# EAGLE board 2018-10-31_17-33-27 (EAGLE 6.4)
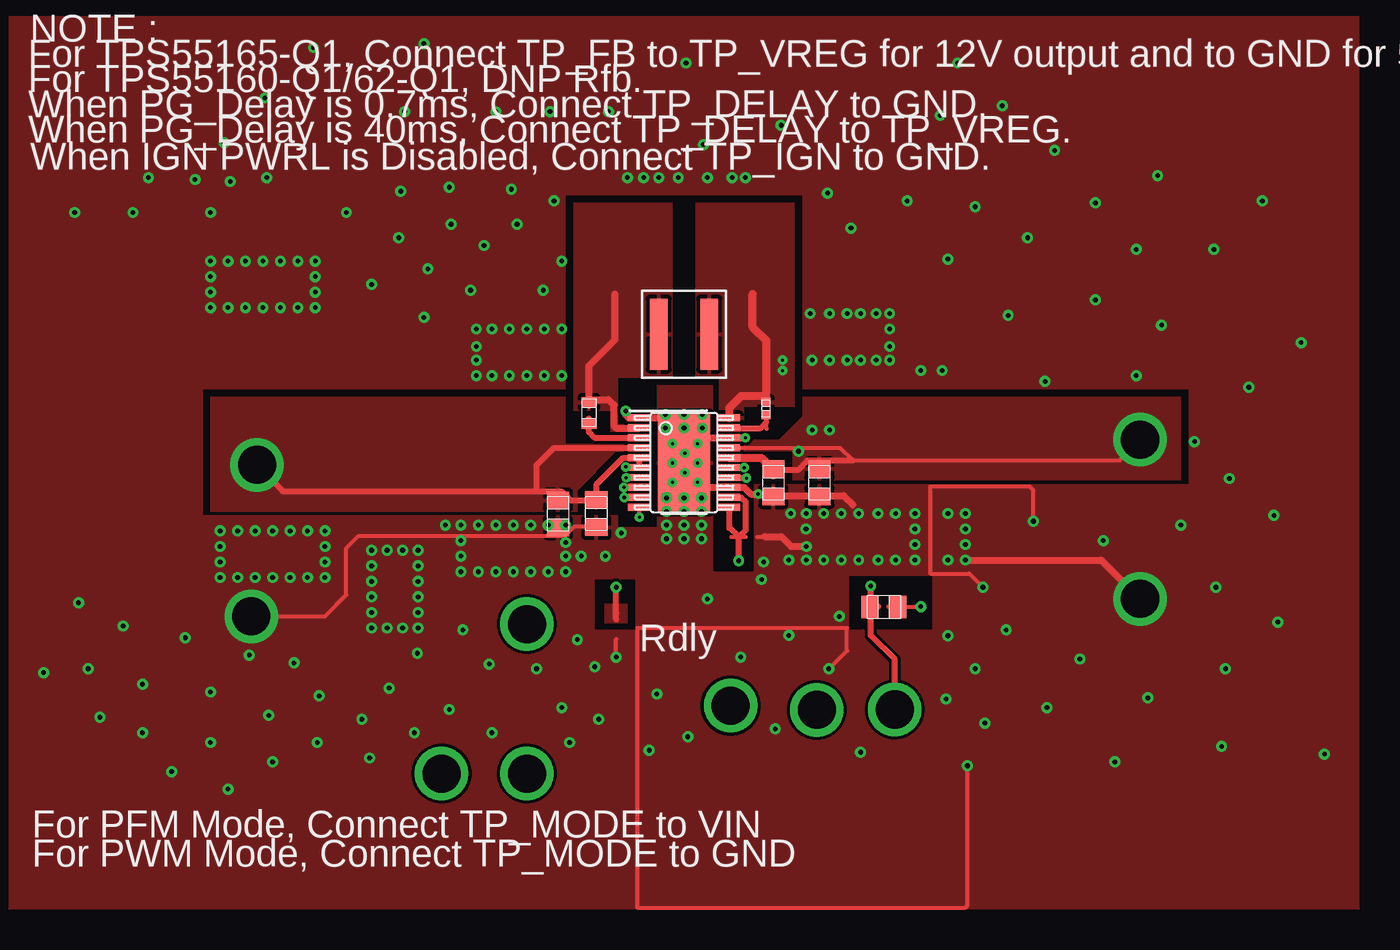
[diagram p0: board, top side]
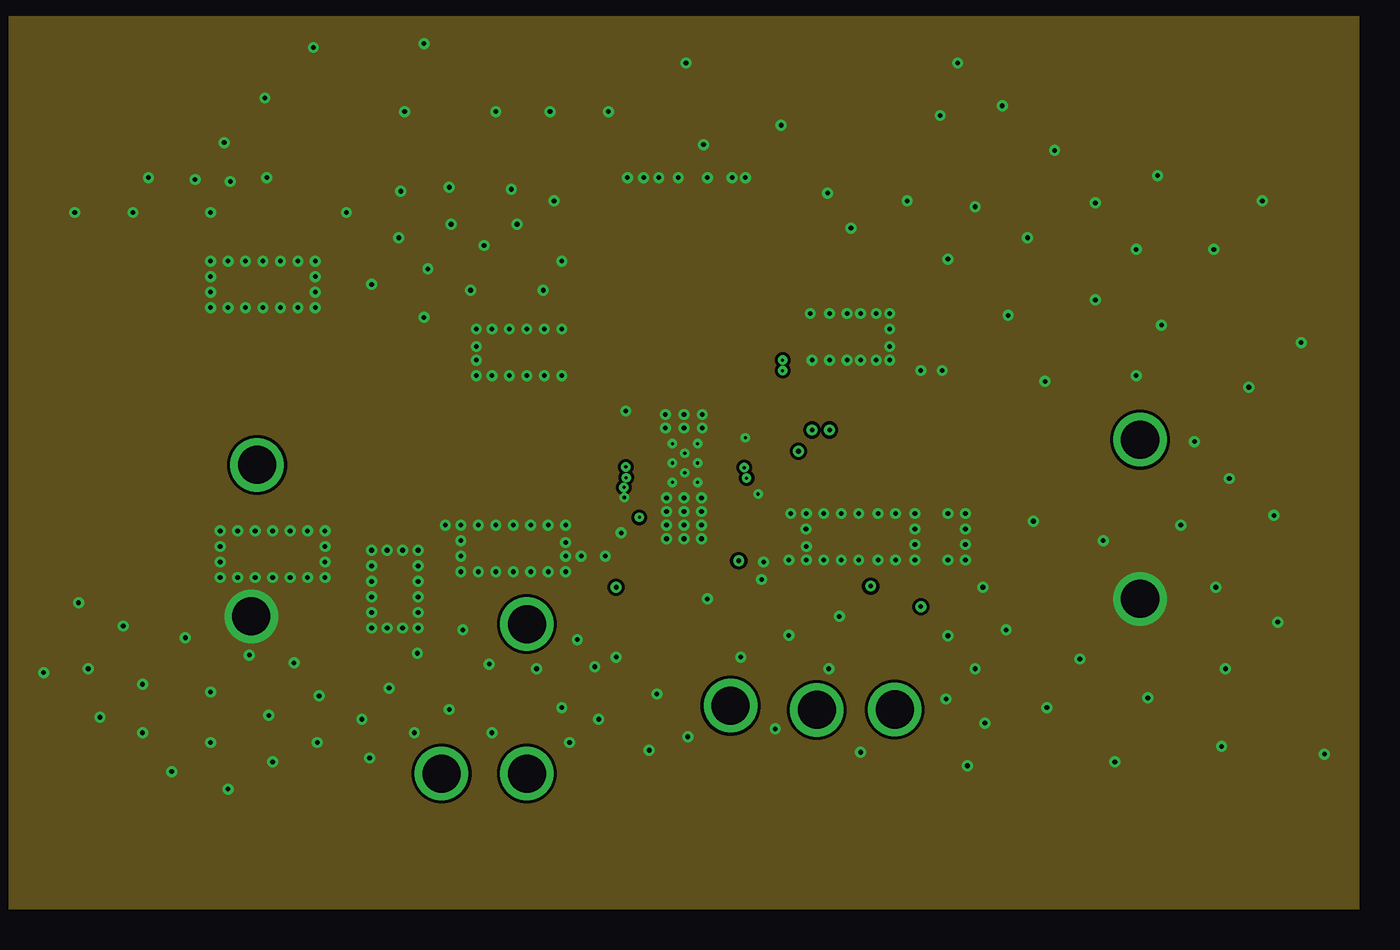
[diagram p1: board, inner layer INTERNAL1]
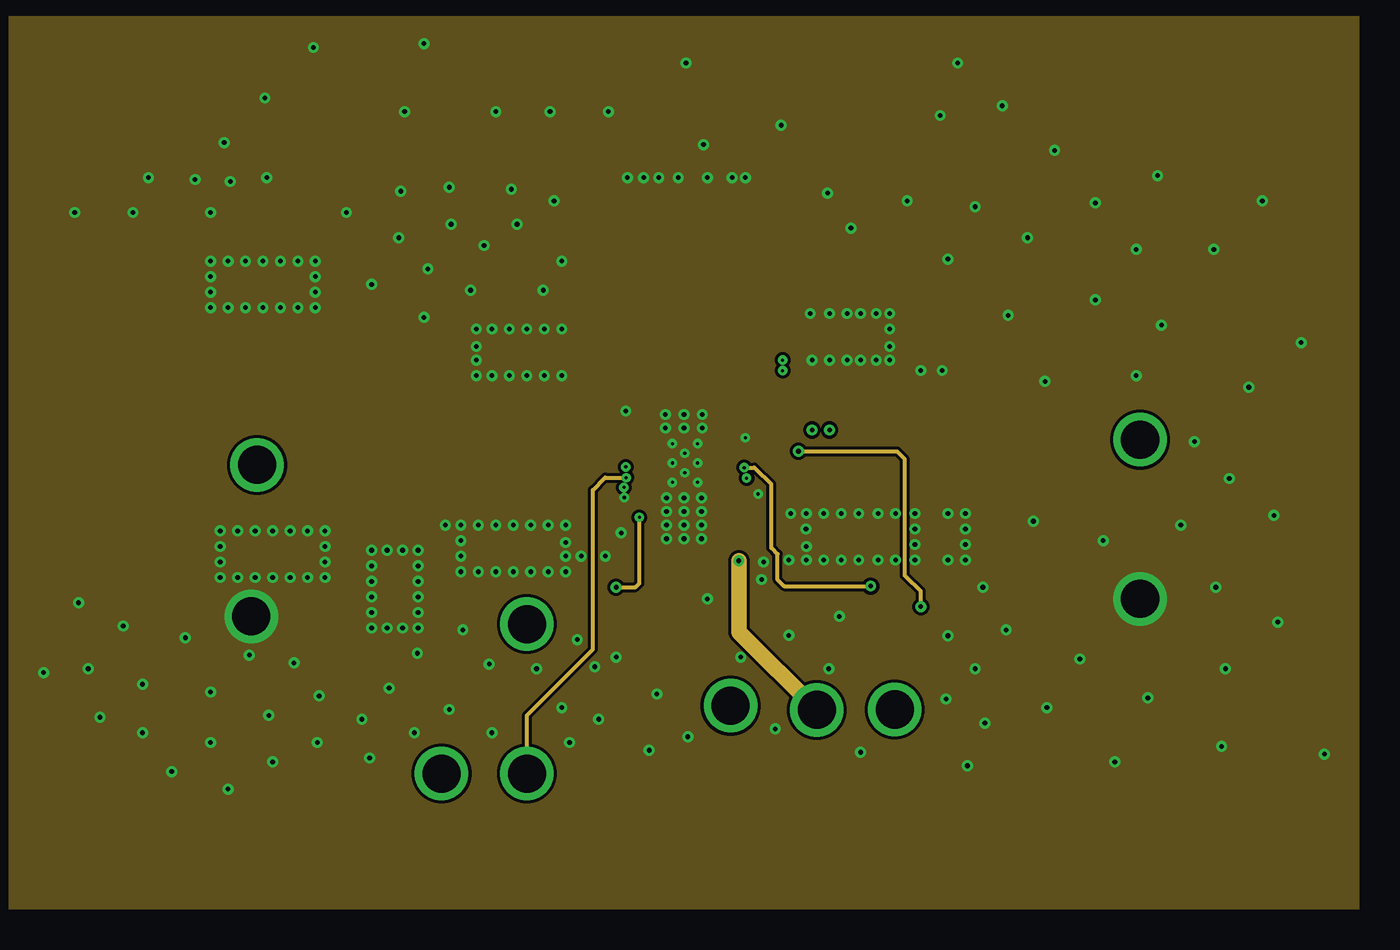
[diagram p2: board, inner layer INTERNAL2]
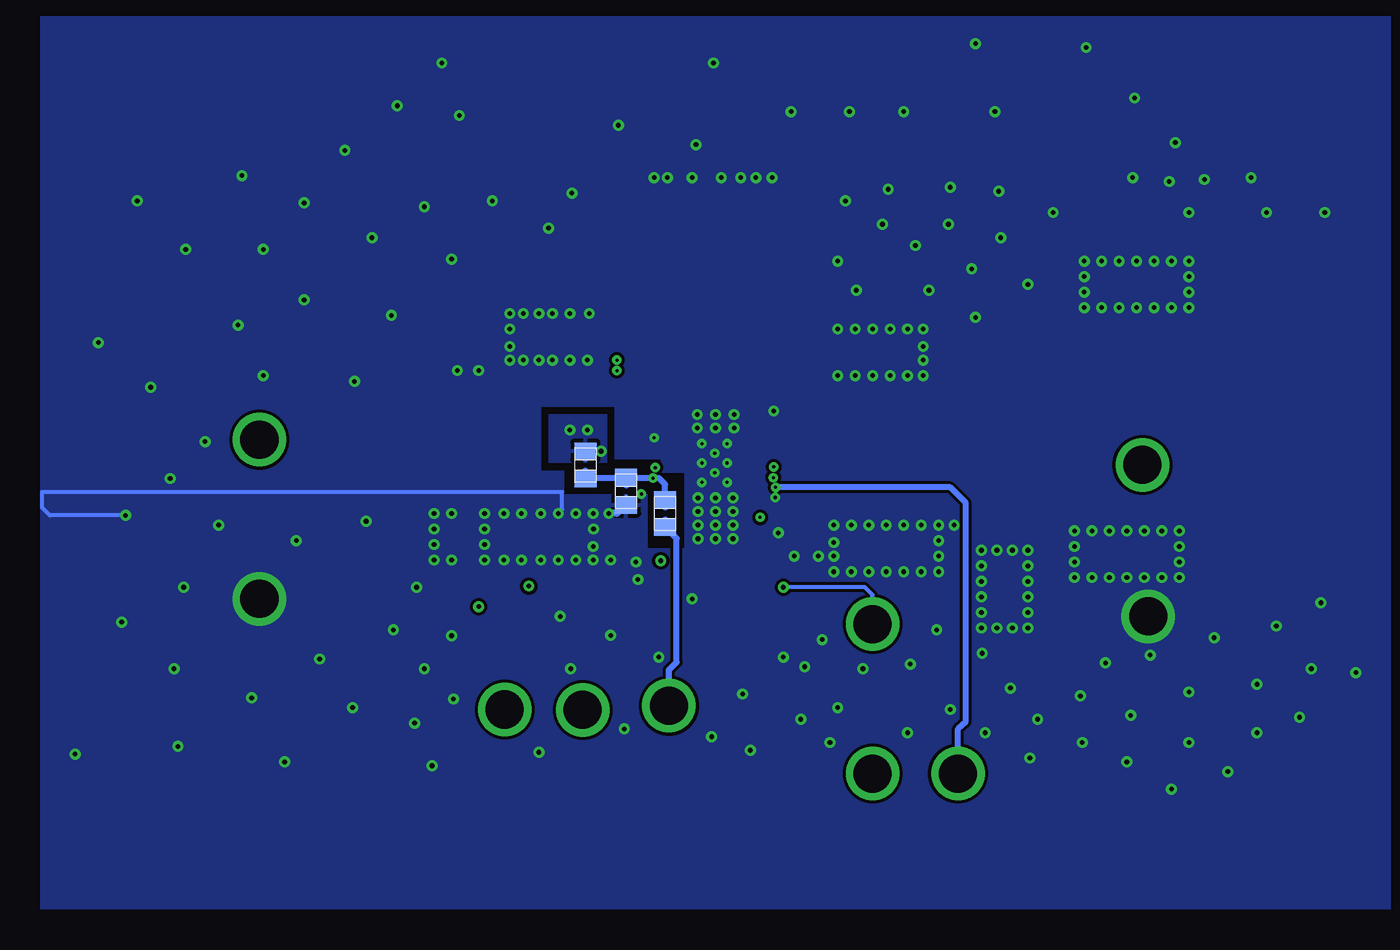
[diagram p3: board, bottom side, seen from below]

No outline drawn. Coordinates in mm, seen from the top.
Copper layers ((1*2)+(15*16)): TOP / INTERNAL1 / layer 15 / BOTTOM

## Footprints (pad centres in the part's own frame; a part is rotated, then mirrored left to right if it is on the bottom)
0603 = smd 0.66 x 0.965: 1 -0.699,0; 2 0.699,0
0402 = smd 0.559 x 0.61: 1 -0.419,0; 2 0.419,0
0805 = smd 1.118 x 1.448: 1 -0.902,0; 2 0.902,0
TP-1502 = drill 0.813 round: 1 0,0
XAL5030 = smd 1.168 x 4.648: 1 -1.651,0; 2 1.651,0
PWP0020P_N = smd 1.4 x 0.45: 1 -2.95,2.925; 2 -2.95,2.275; 3 -2.95,1.625; 4 -2.95,0.975; 5 -2.95,0.325; 6 -2.95,-0.325; 7 -2.95,-0.975; 8 -2.95,-1.625; 9 -2.95,-2.275; 10 -2.95,-2.925; 11 2.95,-2.925; 12 2.95,-2.275; 13 2.95,-1.625; 14 2.95,-0.975; 15 2.95,-0.325; 16 2.95,0.325; 17 2.95,0.975; 18 2.95,1.625; 19 2.95,2.275; 20 2.95,2.925 | smd 3.4 x 6.5: 21 0,0

## Placement (x,y rotation side)
Cbst1  [0603]  64.14,58.65 270 top
Cbst2  [0402]  75.72,58.93 270 top
Cin  [0805]  62.1,52.04 270 top
Cinx  [0805]  64.62,52.07 270 top
Co_sense  [0805]  76.2,54.08 270 top
Cout  [0805]  79.22,54.08 270 top
Cvreg  [0402_065]  74.78,50.55 0 top
GND  [TP-1502]  42.04,45.34 0 top
GND1  [TP-1502]  100.18,46.46 0 top
L1  [XAL5030]  70.36,63.8 180 top
Rfb  [0805]  73.66,52.07 90 bottom
Rfbb  [0805]  76.2,53.52 270 bottom
Rfbt  [0805]  78.87,55.24 270 bottom
Rpg  [0805]  83.44,45.95 180 top
TP_Delay  [TP-1502]  60.05,44.81 0 top
TP_FB  [TP-1502]  73.41,39.5 0 top
TP_IGN  [TP-1502]  54.46,35.03 0 top
TP_MODE  [TP-1502]  60.05,35.03 0 top
TP_PG  [TP-1502]  84.12,39.22 0 top
TP_VREG  [TP-1502]  79.02,39.22 0 top
U1  [PWP0020P_N]  70.36,55.4 0 top
VIN  [TP-1502]  42.42,55.24 0 top
VOUT  [TP-1502]  100.18,56.9 0 top

## Library data of the parts
Cbst1 = ultra-librarian; RefDes: Cbst1; Type: C0603C104Z3VACTU
Cbst2 = ultra-librarian; RefDes: Cbst2; Type: GRM155R71A104KA01D
Cin = ultra-librarian; RefDes: Cin; Type: C2012X5R1V226M125AC
Cinx = ultra-librarian; RefDes: Cinx; Type: GMK212BJ474KG-T
Co_sense = ultra-librarian; RefDes: Co_sense; Type: C2012X7R1H104K085AA
Cout = ultra-librarian; RefDes: Cout; Type: C2012X5R1V226M125AC
Cvreg = ultra-librarian; RefDes: Cvreg; Type: GRM155R61A475MEAAD
GND = ultra-librarian; RefDes: GND; Type: TP-1502
GND1 = ultra-librarian; RefDes: GND1; Type: TP-1502
L1 = ultra-librarian; RefDes: L1; Type: XAL5030-472MEB
Rfb = ultra-librarian; RefDes: Rfb; Type: CRCW06039K09FKEA
Rfbb = ultra-librarian; RefDes: Rfbb; Type: CRCW06039K09FKEA
Rfbt = ultra-librarian; RefDes: Rfbt; Type: CRCW060382K5FKEA
Rpg = ultra-librarian; RefDes: Rpg; Type: ERJ-6ENF1003V
TP_Delay = ultra-librarian; RefDes: TP_Delay; Type: TP-1502
TP_FB = ultra-librarian; RefDes: TP_FB; Type: TP-1502
TP_IGN = ultra-librarian; RefDes: TP_IGN; Type: TP-1502
TP_MODE = ultra-librarian; RefDes: TP_MODE; Type: TP-1502
TP_PG = ultra-librarian; RefDes: TP_PG; Type: TP-1502
TP_VREG = ultra-librarian; RefDes: TP_VREG; Type: TP-1502
U1 = ultra-librarian; RefDes: U1; Type: TPS55165QPWPRQ1
VIN = ultra-librarian; RefDes: VIN; Type: TP-1502
VOUT = ultra-librarian; RefDes: VOUT; Type: TP-1502

## Nets
0: Cin.2 Cinx.2 Co_sense.2 Cout.2 Cvreg.2 GND1.1 GND.1 Rfbb.2 U1.1 U1.9 U1.13 U1.18 U1.21
5: Cin.1 Cinx.1 U1.4 U1.5 U1.6 VIN.1
6: Cbst2.1 L1.1 U1.20
7: Cbst1.1 L1.2 U1.2
8: Co_sense.1 Cout.1 Rfbt.1 Rpg.1 U1.16 U1.17 VOUT.1
9: Cbst1.2 U1.3
13: TP_Delay.1 U1.10
14: Rpg.2 TP_PG.1 U1.15
15: Rfb.2 Rfbb.1 Rfbt.2 U1.14
17: Cvreg.1 TP_VREG.1 U1.11 U1.12
18: TP_MODE.1 U1.7
20: Cbst2.2 U1.19
21: TP_IGN.1 U1.8
22: Rfb.1 TP_FB.1

## Tracks (layer width: path | path; a pad name or v marks a point on that pad's centre or on a via)
0  (via drill 0.2 pad 0.48, 0.3 pad 0.58, 2.49 pad 3.48)
  TOP 0.254: GND.1 46.86,45.34 48.26,46.74 48.26,49.78 49.07,50.6 60.71,50.6 62.59,50.6 63.2,51.23 64.64,51.23 | v65.91,42.67 65.91,43.84 | v93.22,51.56 93.22,53.59 92.96,53.85 86.49,53.85 86.49,48.13 89.03,48.13 v89.92,47.24 | v88.9,35.56 88.9,26.42 88.77,26.29 67.31,26.29 67.31,44.58 81.03,44.58 81.03,43.08 v79.83,41.91 | 76.19,52.76 76.19,53.7 | 75.16,50.53 76.1,50.53 | 64.63,50.75 64.63,51.69
  TOP 0.381: v66.45,53.11 67.44,53.11
  TOP 0.45: 81.41,52.63 80.8,53.24 76.2,53.24 76.1,53.34 v75.21,53.34 74.73,53.34 74.3,53.77 73.33,53.77 71.04,53.77 70.38,54.43 70.38,55.4 70.38,55.78 v71.25,56.64 71.63,57.02 73.33,57.02 74.24,57.02 | v100.2,46.48 97.66,49.02 v88.77,49.02 | v69.14,58.55 68.94,58.32 67.44,58.32 66.73,58.32 66.55,58.52 v66.55,58.78 | v78.36,49.91 77.37,49.91 76.73,50.55 75.64,50.55
  BOTTOM 0.254: v108.97,51.94 113.92,51.94 114.43,52.45 114.43,53.47 80.39,53.47 80.39,52.32 v80.64,52.07 | 76.19,52.22 76.19,53.16
  BOTTOM 0.45: 76.2,52.68 76.81,52.07 v77.34,52.07
  other vias: 54.74,51.31 85.47,52.07 85.47,49.02 84.2,49.02 83.06,49.02 84.2,52.07 85.47,50.04 74.07,42.67 70.41,56.01 74.37,57.02 40.01,50.93 62.36,68.58 83.82,62.1 99.95,61.09 89.41,41.91 91.57,65.02 61.59,78.36 58.04,78.36 53.34,82.8 51.82,73.15 92.84,70.1 94.61,75.82 91.19,78.74 42.93,79.25 46.1,82.55 52.07,78.36 66.65,74.04 69.98,74.04 87.63,68.71 81.28,70.74 76.71,77.47 87.12,78.11 88.27,81.53 65.41,78.36 70.48,81.53 71.63,76.2 74.37,74.04 59.05,73.28 59.44,70.99 56.39,66.67 55.12,70.99 43.94,68.58 106.05,54.36 79.76,73.03 73.51,74.04 71.88,74.04 68.71,74.04 67.72,74.04 61.85,72.52 54.99,73.41 69.6,54.1 71.25,54.1 71.25,55.37 69.6,55.37 69.6,56.64 70.41,54.74 40.67,73.79 84.96,72.52 101.35,74.17 57.28,69.6 49.91,67.06 53.34,64.9 40.51,68.58 45.09,68.58 40.26,76.33 48.26,71.75 89.41,72.14 101.6,64.39 64.52,42.04 68.58,40.26 64.77,38.61 70.61,37.47 81.92,36.45 77.22,44.09 87.63,44.07 97.79,50.29 105.79,41.91 112.27,36.32 87.5,39.93 94.11,39.37 105.16,47.24 98.55,35.81 102.87,51.31 105.54,36.83 100.71,40.01 68.07,36.58 43.43,35.81 34.92,37.72 51.05,40.64 36.83,35.18 41.91,42.8 46.35,37.08 39.37,40.39 37.72,43.94 30.73,46.23 39.37,37.08 46.48,40.13 49.78,36.07 52.7,37.72 57.78,37.72 62.87,37.08 43.18,38.86 62.36,39.37 54.99,39.24 52.91,42.93 60.71,41.91 63.37,43.81 55.88,44.45 57.61,42.21 109.22,44.96 97.28,66.04 93.98,60.71 99.95,69.34 97.28,72.39 105.03,69.34 107.31,60.33 110.74,63.25 108.2,72.52 91.44,44.45 90.04,38.35 96.27,42.55 103.76,56.77 49.28,38.61 40.51,34.04 44.83,42.29 34.92,40.89 31.37,41.91 33.66,44.7 32.13,38.73 28.45,41.66 53.59,68.07 51.69,70.1 42.8,68.58 30.48,71.75 39.37,71.75 35.31,74.04 34.29,71.75 38.35,73.91 43.05,74.04 41.66,68.58 80.52,45.34 71.5,50.42 69.22,50.42 70.36,50.42 71.5,51.31 69.22,51.31 70.36,51.31 71.5,53.09 71.55,58.55 70.36,58.55 69.14,57.66 70.36,57.66 71.55,57.66 69.22,53.09 69.22,52.2 70.36,53.09 71.5,52.2 70.36,52.2 65.2,49.28 42.29,47.88 43.43,47.88 45.72,47.88 41.15,47.88 44.58,47.88 39.37,66.55 39.37,67.56 39.37,68.58 46.23,68.58 46.23,67.56 46.23,66.55 40.01,47.88 40.01,48.9 40.01,49.91 52.96,49.66 57.78,64.14 56.77,62.99 56.77,62.1 60.07,64.14 61.21,64.14 56.77,64.14 58.93,64.14 62.36,64.14 62.61,48.26 62.61,49.28 60.33,48.26 59.18,48.26 56.9,48.26 61.47,48.26 58.04,48.26 88.77,50.04 88.77,51.05 87.63,49.02 78.36,49.02 81.79,49.02 77.22,49.02 79.5,49.02 80.64,49.02 78.61,65.15 81.92,65.15 82.93,62.1 79.88,65.15 81.03,65.15 83.82,64.14 82.93,65.15 61.14,66.67 83.82,65.15 87.25,61.42 85.85,61.42 76.33,37.97 87.63,52.07 83.06,52.07 78.36,52.07 81.79,52.07 79.5,52.07 88.77,52.07 62.61,51.31 60.33,51.31 59.18,51.31 56.9,51.31 61.47,51.31 58.04,51.31 55.75,51.31 55.75,50.29 55.75,49.28 55.75,48.26 44.58,50.93 41.15,50.93 45.72,50.93 43.43,50.93 42.29,50.93 46.86,47.88 46.86,48.9 46.86,49.91 46.86,50.93 46.23,65.53 39.37,65.53 43.94,65.53 40.51,65.53 45.09,65.53 42.8,65.53 41.66,65.53 57.78,61.09 62.36,61.09 58.93,61.09 56.77,61.09 61.21,61.09 60.07,61.09 81.03,62.1 79.88,62.1 81.92,62.1 83.82,62.99 78.74,62.1 49.91,47.62 52.96,44.58 51.94,44.58 52.96,45.59 52.96,46.61 50.93,44.58 52.96,47.62 49.91,44.58 49.91,45.59 51.94,49.66 52.96,48.64 49.91,46.61 50.93,49.66 49.91,49.66 49.91,48.64 71.88,46.48 75.44,47.75 63.63,49.28 75.56,48.9 85.47,51.05 78.33,51.05 66.24,50.8 62.61,50.16 42.04,45.34
  pour TOP (rank 4): 65.15,43.18 65.15,44.48 66.65,44.48 66.65,43.18
  pour TOP (rank 6): 86.61,44.45 67.44,44.45 67.44,26.16 114.55,26.16 114.55,84.58 26.16,84.58 26.16,26.16 67.31,26.16 67.31,44.45 64.52,44.45 64.52,47.75 67.18,47.75 67.18,44.58 81.15,44.58 81.15,48.01 86.49,48.01 86.49,53.98 74.93,53.98 74.93,48.26 72.26,48.26 72.26,60.45 68.58,60.45 68.58,51.18 66.04,51.18 66.04,51.94 38.86,51.94 38.86,60.2 62.61,60.2 62.61,72.9 78.11,72.9 78.11,60.2 103.38,60.2 103.38,53.98 86.61,53.98
  pour BOTTOM (rank 5): 73.91,54.74 72.39,54.74 72.39,49.78 74.8,49.78 74.8,53.34 114.55,53.34 114.55,26.16 26.16,26.16 26.16,84.58 114.55,84.58 114.55,53.47 80.26,53.47 80.26,54.86 81.79,54.86 81.79,59.05 76.96,59.05 76.96,55.63 73.91,55.63
  pour INTERNAL2 (rank 4): 26.16,84.58 114.55,84.58 114.55,26.16 26.16,26.16
  pour INTERNAL1 (rank 5): 26.16,84.58 114.55,84.58 114.55,26.16 26.16,26.16
5  (via drill 0.2 pad 0.48, 2.49 pad 3.48)
  TOP 0.254: 64.63,52.45 64.63,53.39
  TOP 0.381: 60.71,53.52 60.71,55.22 61.85,56.36 67.44,56.36 | VIN.1 44.12,53.52 60.71,53.52 | v66.55,55.12 66.57,55.07 67.44,55.07 67.44,55.7 66.37,55.7 64.64,53.98 64.64,52.93 62.92,52.93 62.33,53.52 60.71,53.52
  other vias: 42.42,55.24
  pour TOP (rank 2): 63.37,53.59 65.91,56.13 68.2,56.13 68.2,56.64 62.61,56.64 62.61,59.69 39.37,59.69 39.37,52.2 63.37,52.2
6  (via drill 0.2 pad 0.58)
  TOP 0.254: 75.75,59.28 75.75,60.22
  TOP 0.508: 73.33,58.32 73.33,58.98 74.12,59.77 75.74,59.77 75.74,63.37 74.85,64.26 74.85,66.42
  other vias: 76.81,62.1 76.81,61.42
  pour TOP (rank 3): 71.12,72.39 77.6,72.39 77.6,59.05 74.3,59.05 74.3,58.04 72.64,58.04 72.64,60.96 71.12,60.96
7
  TOP 0.254: 64.12,59.03 64.12,59.97
  TOP 0.45: 67.44,57.66 65.91,57.66 65.79,57.78 65.79,59.16 65.41,59.51 64.14,59.51 64.14,61.72 65.84,63.42 65.84,66.42
  pour TOP (rank 2): 68.2,57.4 65.53,57.4 65.53,58.8 63.12,58.8 63.12,72.39 69.6,72.39 69.6,60.96 66.04,60.96 66.04,57.91 68.2,57.91
8  (via drill 0.3 pad 0.58, 2.49 pad 3.48)
  TOP 0.254: 73.33,56.36 80.57,56.36 81.41,55.55 98.86,55.55 v100.2,56.9 | v85.85,45.97 84.28,45.97 83.72,45.97 | 83.8,45.96 84.73,45.96 | 76.19,54.46 76.19,55.4
  TOP 0.381: 76.2,54.48 76.2,54.94 77.85,54.94 78.44,55.55 81.41,55.55
  TOP 0.508: 76.2,54.94 75.41,55.7 73.33,55.7
  INTERNAL2 0.254: v77.85,56.13 84.3,56.13 84.81,55.6 84.81,48.01 85.85,46.99 v85.85,45.97
  BOTTOM 0.254: 78.85,55.6 78.85,56.54
  other vias: 78.74,57.53 79.88,57.53
  pour TOP (rank 3): 74.93,56.9 76.58,56.9 78.11,58.42 78.11,59.69 102.87,59.69 102.87,54.23 77.47,54.23 77.47,56.13 72.64,56.13 72.64,56.64
  pour BOTTOM: 77.47,55.37 77.47,58.55 81.28,58.55 81.28,55.37
9
  TOP 0.254: 64.12,57.33 64.12,58.27
  TOP 0.381: 67.44,57.02 64.49,57.02 64.14,57.4 64.14,57.81 64.14,58.27
13  (via drill 0.2 pad 0.48, 0.3 pad 0.58, 2.49 pad 3.48)
  TOP 0.254: v67.44,51.82 67.44,52.45
  TOP 0.381: 65.91,45.14 65.91,45.54 v65.91,47.24
  INTERNAL2 0.254: v67.44,51.82 67.44,47.5 67.18,47.24 v65.91,47.24
  BOTTOM 0.254: v60.07,44.83 60.07,46.74 60.58,47.24 v65.91,47.24
  pour TOP: 65.15,44.88 65.15,46.18 66.65,46.18 66.65,44.88
14  (via drill 0.2 pad 0.48, 0.3 pad 0.58, 2.49 pad 3.48)
  TOP 0.254: 82.09,45.96 83.03,45.96
  TOP 0.381: 73.33,55.07 v74.3,55.07 | 82.58,45.97 v82.58,47.32 | 82.58,45.97 83.06,45.97 | 82.58,45.97 82.58,44.07 84.15,42.52 v84.15,39.24
  INTERNAL2 0.254: v74.3,55.07 74.95,55.07 76.07,53.98 76.07,49.81 76.48,49.4 76.48,47.73 76.91,47.32 v82.58,47.32
15  (via drill 0.2 pad 0.48)
  TOP 0.381: 73.33,54.41 74.42,54.41 v74.45,54.38
  BOTTOM 0.254: 76.19,53.9 76.19,54.84 | 78.85,53.9 78.85,54.84 | 73.65,52.43 73.65,53.37
  BOTTOM 0.381: 76.2,54.38 v74.45,54.38 74.07,54.38 73.66,53.98 73.66,52.91 73.66,52.45 | 78.87,54.38 78.87,54.89 | 76.2,54.38 78.84,54.38 | 76.2,54.38 | 76.2,53.9 76.2,54.38
17  (via drill 0.3 pad 0.58, 2.49 pad 3.48)
  TOP 0.254: 73.46,50.53 74.4,50.53
  TOP 0.381: 73.94,50.55 73.33,51.13 73.33,52.45 | 73.33,53.11 74.09,53.11 74.4,52.81 74.4,50.98 73.94,50.55 | v73.94,48.97 73.94,50.55
  INTERNAL2 1.016: v79.05,39.22 73.94,44.3 v73.94,48.97
18  (via drill 0.2 pad 0.48, 2.49 pad 3.48)
  TOP 0.254: v66.57,54.41 67.44,54.41
  INTERNAL2 0.254: v66.57,54.41 65.2,54.41 64.39,53.59 64.39,43.18 60.07,38.86 v60.07,35.05
20
  TOP 0.254: 75.75,57.58 75.75,58.52
  TOP 0.381: 73.33,57.66 75.36,57.66 75.74,58.06
21  (via drill 0.2 pad 0.48, 2.49 pad 3.48)
  TOP 0.381: v66.42,53.77 67.44,53.77
  BOTTOM 0.381: v66.42,53.77 54.99,53.77 53.98,52.76 53.98,38.46 54.48,37.97 v54.48,35.05
22  (via drill 2.49 pad 3.48)
  BOTTOM 0.254: 73.65,50.72 73.65,51.66
  BOTTOM 0.381: 73.66,51.69 73.66,51.21 72.9,50.44 72.9,42.34 73.41,41.83 TP_FB.1
  other vias: 73.41,39.5

## Text on the board
ASSYNOTES: NOTE : | For TPS55165-Q1, Connect TP_FB to TP_VREG for 12V output and to GND for 5V output. DNP Rfbb and Rfbt. | For TPS55160-Q1/62-Q1, DNP Rfb. | When PG_Delay is 0.7ms, Connect TP_DELAY to GND. | When PG_Delay is 40ms, Connect TP_DELAY to TP_VREG. | When IGN PWRL is Disabled, Connect TP_IGN to GND. | Rdly | For PFM Mode, Connect TP_MODE to VIN | For PWM Mode, Connect TP_MODE to GND